# Altium PCB BasePCB.PcbDoc
Units mil, origin at the board's own origin, x right, y up, seen from the top; angles counter-clockwise.
Board outline 2700 x 2700 mil, 2 copper layers (Top Layer, Bottom Layer); 47 components, 69 nets, 235 pads, 32 vias.
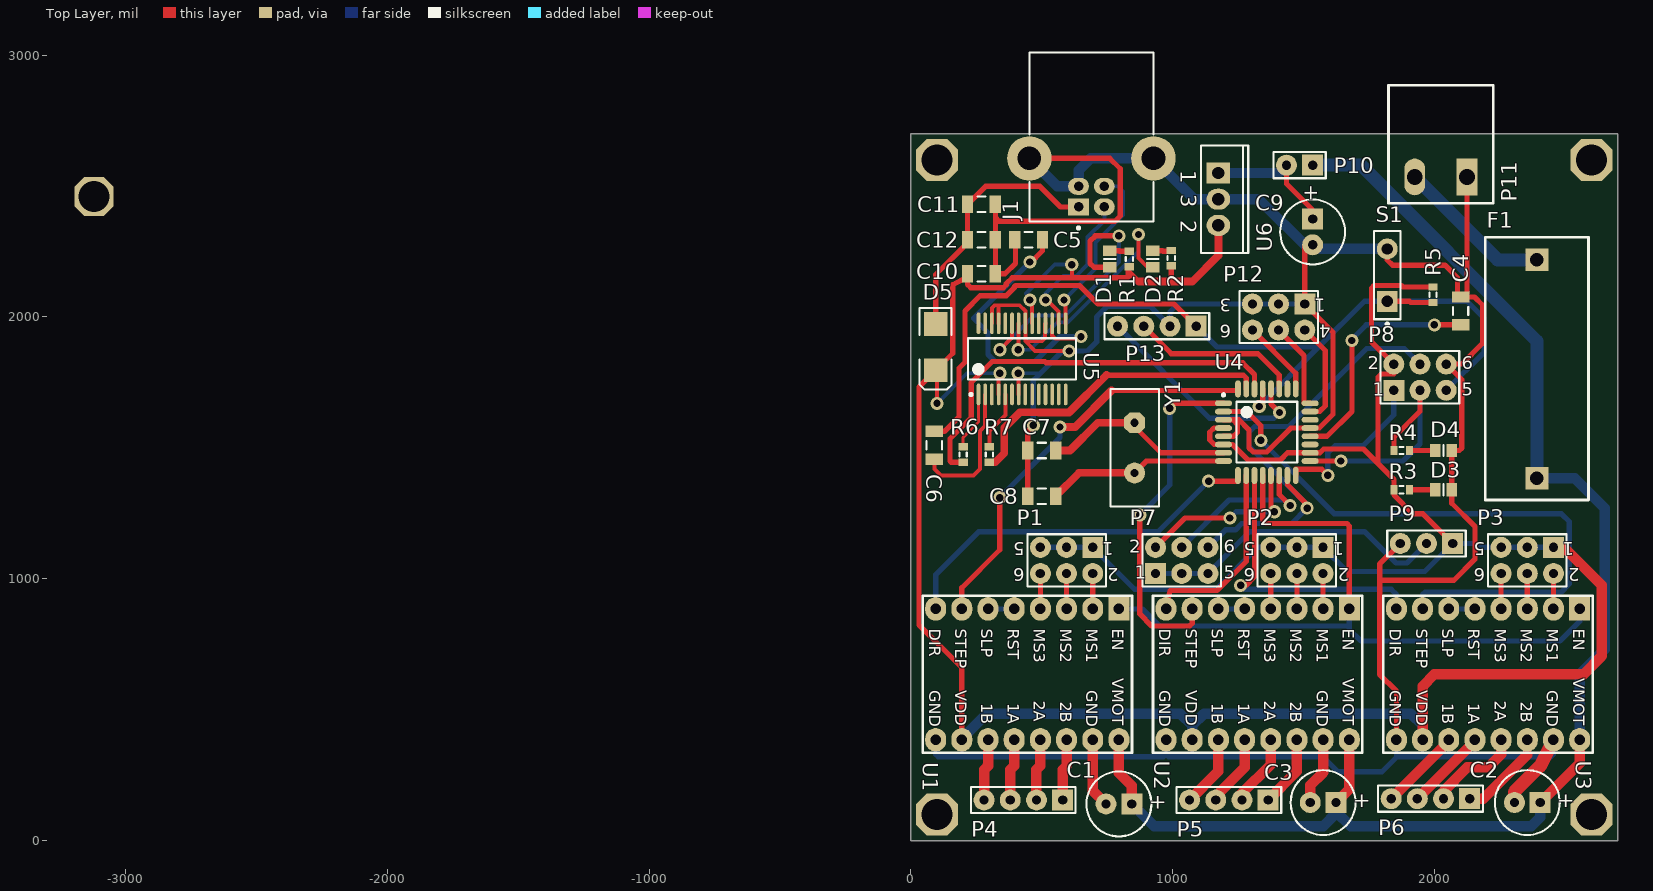
[diagram p0: Top Layer view]
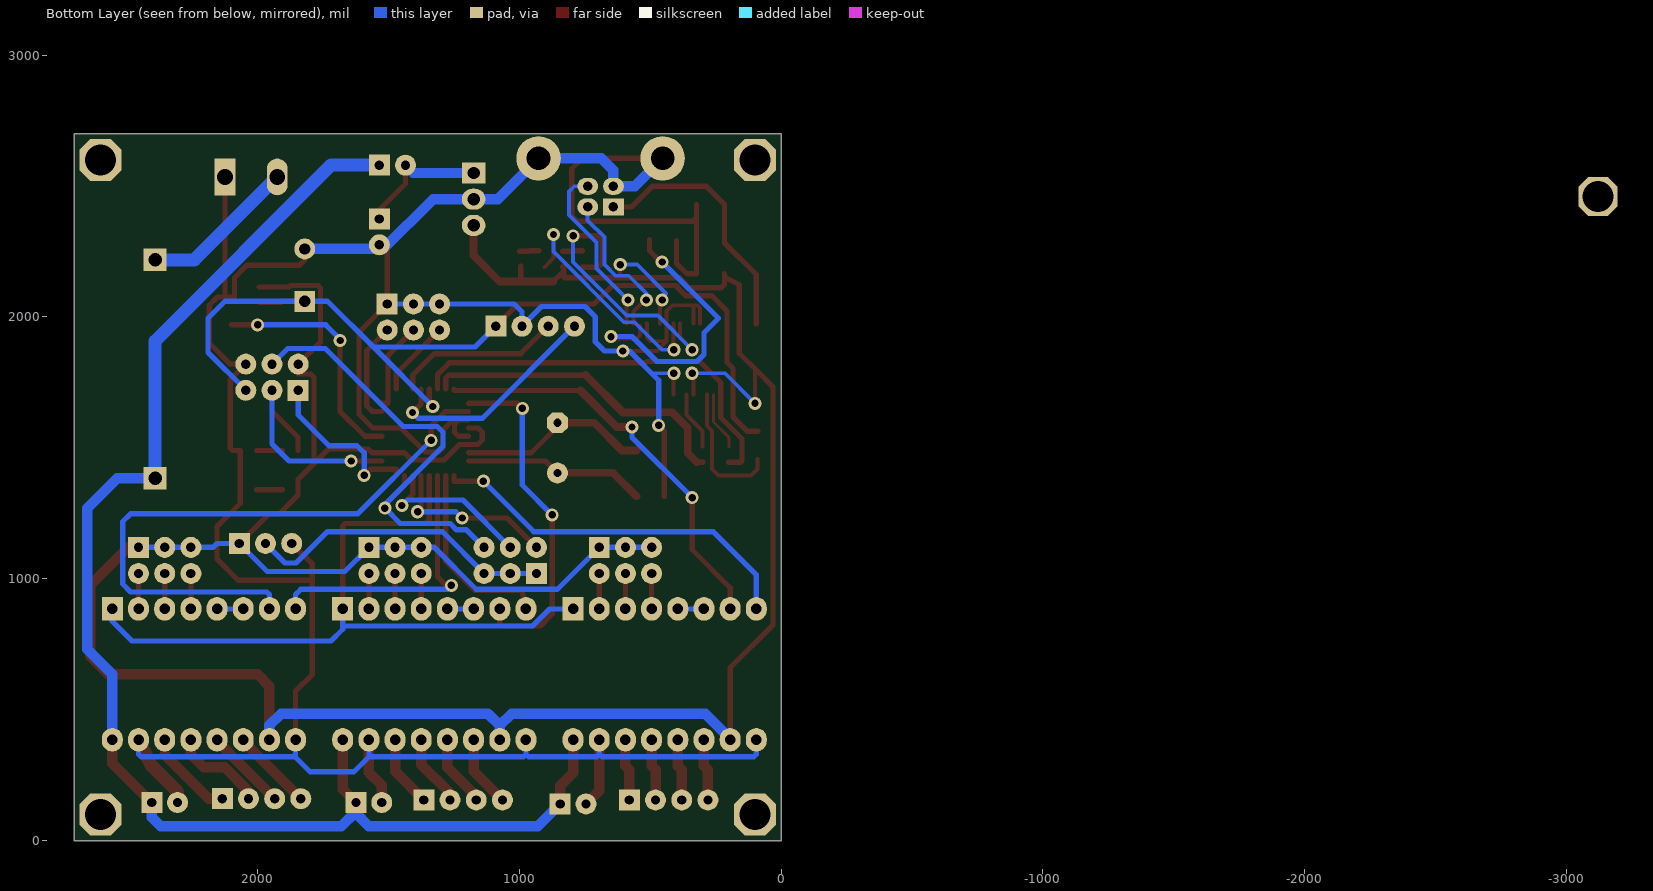
[diagram p1: Bottom Layer view, seen from below]

## Layer stack, top to bottom
Top Solder: solder mask 0.4, Solder Resist, Dk 3.5
Top Layer: signal copper 1.4
Dielectric 1: dielectric 12.6, FR-4, Dk 4.8
Bottom Layer: signal copper 1.4
Bottom Solder: solder mask 0.4, Solder Resist, Dk 3.5

## Board outline
0,0 2700,0 2700,2700 0,2700

## Design rules (kind name [scope] priority, off if disabled: settings)
Clearance [All] p1: gap=10
PolygonConnect [All] p1: connectstyle=Relief reliefconductorwidth=10 reliefentries=4 polygonreliefangle="90 Angle" airgapwidth=10
RoutingVias [All] p1: holewidth=28 width=50 viastyle="Through Hole" minholewidth=28 minwidth=50 maxholewidth=28 maxwidth=50
SolderMaskExpansion [All] p1: expansion=4
Width [All] p1: maxlimit=50 minlimit=10 preferedwidth=20
30 further rules are at their usual default settings.

## Components (designator, comment, footprint, x,y, rotation, side; value= is the part's Value field where it differs from the comment)
C1 "Cap Pol" CAPPR2.5-6.3x6.8/H.9 795,140 r180 top
C2 "Cap Pol" CAPPR2.5-6.3x6.8/H.9 2355,145 r180 top
C3 "Cap Pol" CAPPR2.5-6.3x6.8/H.9 1575,145 r180 top
C4 "Cap" C1206 2100,2023.15 r270 top
C5 "Cap" C1206 450,2295 r0 top
C6 "Cap" C1206 90,1510 r90 top
C7 "Cap" C1206 500,1490 r180 top
C8 "Cap" C1206 500,1315 r180 top
C9 "Cap Pol" CAPPR2.5-6.3x6.8/H.9 1535,2325 r270 top
C10 "Cap" C1206 270,2165 r180 top
C11 "Cap" C1206 270,2430 r180 top
C12 "Cap" C1206 270,2295 r180 top
D1 "LED" 6-0805_L 760,2221.5 r270 top
D2 "LED" 6-0805_L 925,2221.5 r270 top
D3 "LED" 6-0805_L 2035,1340 r0 top
D4 "LED" 6-0805_L 2035,1490 r0 top
D5 "Diode" DSO-C2/X2.3 95,1885 r270 top
F1 "Fuse" BLX-A 2195,2305 r270 top
J1 "USB Type B" USB2.5-2H4D 690,2460 r90 top
P1 "Header 3X2" HDR2X3 695,1120 r180 top
P2 "Header 3X2" HDR2X3 1575,1120 r180 top
P3 "Header 3X2" HDR2X3 2455,1120 r180 top
P4 "Header 4" HDR1X4 580,155 r180 top
P5 "Header 4" HDR1X4 1365,155 r180 top
P6 "Header 4" HDR1X4 2135,160 r180 top
P7 "Header 3X2" HDR2X3 935,1020 r0 top
P8 "ICSP" HDR2X3 1845,1720 r0 top
P9 "Header 3" HDR1X3 2070,1135 r180 top
P10 "Header 2" HDR1X2 1535,2580 r180 top
P11 "Header 2" "2Pin Phoenix Contact" 2225,2435 r90 top
P12 "Header 3X2A" HDR2X3_CEN 1505,2050 r180 top
P13 "Header 4" HDR1X4 1090,1965 r180 top
R1 "Res" J1-0603 835,2221.5 r90 top
R2 "Res" J1-0603 995,2225 r90 top
R3 "Res" J1-0603 1875,1340 r0 top
R4 "Res" J1-0603 1875,1490 r0 top
R5 "Res" J1-0603 1995,2085 r90 top
R6 "Res" J1-0603 200,1475 r90 top
R7 "Res" J1-0603 300,1475 r90 top
S1 "SW-PB" SPST-2 1820,2160 r90 top
U1 "A4988" DIP16 45,935 r270 top
U2 "A4988" DIP16 925,935 r270 top
U3 "A4988" DIP16 1805,935 r270 top
U4 "ATmega328P-AU" 32A_N 1360,1560 r0 top
U5 "FT232RL-Reel" SSOP-28_N 425,1840 r90 top
U6 "L78M05CP" ISOWATT220AB 1175,2450 r270 top
Y1 "XTAL" BCY-W2/E4.7 855,1500 r270 top

## Footprints (in the part's own frame and the unit in brackets; to place one, negate y for a bottom-side part, rotate by r counter-clockwise, add the part's x,y. Pads: shape width x height; smd on the part's side, far side on the other; paste and mask are expansions set on the pad)
"2Pin Phoenix Contact" [mil]
  rect 140x80 hole 60: 1(100,100)
  oval 140x80 hole 60: 2(100,300)
  silkscreen extent 0,0 450,400
6-0805_L [mm] "Chip Resistor, Body 2.0x1.2mm, IPC High Density"
  rect 1x1.3 smd: 1(-0.8,0) 2(0.8,0)
  silkscreen extent 0,-0.55 0,0.55, body extent -1.07,-0.7 1.07,0.7, height 0.7
32A_N [mm] "Thin QFP, 32-Leads, Body 7x7mm, Pitch 0.8mm, IPC Medium Density"
  oval 1.65x0.55 smd: 1(-4.2,2.8) 2(-4.2,2) 3(-4.2,1.2) 4(-4.2,0.4) 5(-4.2,-0.4) 6(-4.2,-1.2) 7(-4.2,-2) 8(-4.2,-2.8) 17(4.2,-2.8) 18(4.2,-2) 19(4.2,-1.2) 20(4.2,-0.4) 21(4.2,0.4) 22(4.2,1.2) 23(4.2,2) 24(4.2,2.8)
  oval 0.55x1.65 smd: 9(-2.8,-4.2) 10(-2,-4.2) 11(-1.2,-4.2) 12(-0.4,-4.2) 13(0.4,-4.2) 14(1.2,-4.2) 15(2,-4.2) 16(2.8,-4.2) 25(2.8,4.2) 26(2,4.2) 27(1.2,4.2) 28(0.4,4.2) 29(-0.4,4.2) 30(-1.2,4.2) 31(-2,4.2) 32(-2.8,4.2)
  silkscreen extent -4.32,-2.95 2.95,3.75, body extent -3.5,-3.5 3.5,3.5, height 1.2
BCY-W2/E4.7 [mil] "Quartz Crystal, Thru-Hole; 2 Leads; Body 11.35 x 4.65 x 13.46 mm (LxWxH max)"
  oct 80x80 hole 31.5: 1(-96.06,0)
  round 80 hole 31.5: 2(96.06,0)
  silkscreen extent -224,-93 224,93
BLX-A [mm]
  rect 2.2x2.2 hole 1.3: 1(2.2,5) 2(23.4,5)
  silkscreen extent 0,0 25.5,10
C1206 [mm] "Chip Capacitor, Body 3.2x1.6mm, IPC High Density"
  rect 1.1x1.7 smd: 1(-1.35,0) 2(1.35,0)
  silkscreen extent -0.4,-0.75 0.4,0.75, body extent -1.7,-0.9 1.7,0.9, height 1.3
CAPPR2.5-6.3x6.8/H.9 [mil] "Capacitor, Electrolytic, Radial; Body 6.3 x 6.8 mm (Dia.xH typ); Pin Spacing 2.5 mm (typ)"
  rect 80x80 hole 35.43: 1(-49.21,0)
  round 80 hole 35.43: 2(49.21,0)
  silkscreen extent -124,-124 124,124
DIP16 [mil]
  rect 90x80 hole 40: 1(50,750)
  oval 90x80 hole 40: 2(50,650) 3(50,550) 4(50,450) 5(50,350) 6(50,250) 7(50,150) 8(50,50) 9(550,50) 10(550,150) 11(550,250) 12(550,350) 13(550,450) 14(550,550) 15(550,650) 16(550,750)
  silkscreen extent 0,0 600,800
DSO-C2/X2.3 [mm] "DO-214-AA/SMB; 2 C-Bend Leads; Body 5.3 x 3.6 mm, inc. leads (LxW)"
  rect 2.3x2.3 smd: 1(-2.25,0) 2(2.25,0)
  silkscreen extent -3.8,-1.55 4.1,1.55
HDR1X2 [mil] "Connector; Header; 2 Position"
  rect 80x80 hole 35.43: 1(0,0)
  round 80 hole 35.43: 2(100,0)
  silkscreen extent -50,-50 150,50
HDR1X3 [mil] "Connector; Header; 3 Position"
  rect 80x80 hole 35.43: 1(0,0)
  round 80 hole 35.43: 2(100,0) 3(200,0)
  silkscreen extent -50,-50 250,50
HDR1X4 [mil] "Connector; Header; 4 Position"
  rect 80x80 hole 35.43: 1(0,0)
  round 80 hole 35.43: 2(100,0) 3(200,0) 4(300,0)
  silkscreen extent -50,-50 350,50
HDR2X3 [mil] "Connector; Header; 3x2 Position"
  rect 80x80 hole 35.43: 1(0,0)
  round 80 hole 35.43: 2(0,100) 3(100,0) 4(100,100) 5(200,0) 6(200,100)
  silkscreen extent -50,-50 250,150
HDR2X3_CEN [mil] "Connector; Header; 3x2 Position"
  rect 80x80 hole 35.43: 1(0,0)
  round 80 hole 35.43: 2(100,0) 3(200,0) 4(0,100) 5(100,100) 6(200,100)
  silkscreen extent -50,-50 250,150
ISOWATT220AB [mil] "TO, Thru-Hole, Vertical, Heatsink Mounted; 3 In-Line Leads; Pitch 2.54 mm; Pin sequence 1, 3, 2"
  rect 80x90 hole 47.24: 1(-100,0)
  oval 80x90 hole 47.24: 2(100,0) 3(0,0)
  silkscreen extent -205,-67 205,114
J1-0603 [mm] "Chip Resistor, Body 1.6x0.8mm, IPC High Density"
  rect 0.7x0.9 smd: 1(-0.75,0) 2(0.75,0)
  silkscreen extent -0.2,-0.35 0.2,0.35, body extent -0.85,-0.48 0.85,0.48, height 0.9
SPST-2 [mil] "Switch; 2 Leads"
  rect 80x80 hole 43.31: 1(-100,0)
  round 80 hole 43.31: 2(100,0)
  silkscreen extent -192,-50 169,50
SSOP-28_N [mm] "SOP, 28-Leads, Body 10.2x5.3mm, Pitch 0.65mm, IPC Medium Density"
  oval 2.1x0.35 smd: 1(-3.45,4.225) 2(-3.45,3.575) 3(-3.45,2.925) 4(-3.45,2.275) 5(-3.45,1.625) 6(-3.45,0.975) 7(-3.45,0.325) 8(-3.45,-0.325) 9(-3.45,-0.975) 10(-3.45,-1.625) 11(-3.45,-2.275) 12(-3.45,-2.925) 13(-3.45,-3.575) 14(-3.45,-4.225) 15(3.45,-4.225) 16(3.45,-3.575) 17(3.45,-2.925) 18(3.45,-2.275) 19(3.45,-1.625) 20(3.45,-0.975) 21(3.45,-0.325) 22(3.45,0.325) 23(3.45,0.975) 24(3.45,1.625) 25(3.45,2.275) 26(3.45,2.925) 27(3.45,3.575) 28(3.45,4.225)
  silkscreen extent -3.57,-5.25 2,5.25, body extent -2.8,-5.25 2.8,5.25, height 2
USB2.5-2H4D [mm] "Connector; USB1.1, Type B, Thru-Hole; 4 Position; Right Angle"
  rect 1.651x2.032 hole 0.92: 1(-1,1.25)
  oval 1.651x2.032 hole 0.92: 2(-1,-1.25) 3(1,-1.25) 4(1,1.25)
  round 4.318 hole 2.3: 5(3.71,6.02) 6(3.71,-6.02)
  silkscreen extent -3.18,-6.02 13.99,6.02, body extent -2.41,-6.02 13.99,6.02, height 11.1

## Part data
C1 C2 C3 C9: library part "Cap Pol1", "Polarized Capacitor (Radial)"
C4 C5 C6 C7 C8 C10 C11 C12: library part "Cap Semi", "Capacitor (Semiconductor SIM Model)"
D1 D2 D3 D4: library part LED3, "Typical BLUE SiC LED"
D5: "Default Diode"
F1: library part "Fuse 2"
J1: library part "Header 6", "Header, 6-Pin"
P1 P2 P3 P7 P12: "Header, 3-Pin, Dual row"
P4 P5 P6 P13: "Header, 4-Pin"
P8: library part "Header 3X2", "Header, 3-Pin, Dual row"
P9: "Header, 3-Pin"
P10 P11: "Header, 2-Pin"
R1 R2 R3 R4 R5 R6 R7: library part Res3, "Resistor"
S1: "Switch"
U1 U2 U3: "Stepper Motor Driver"
U4: "8-bit AVR Microcontroller, 32KB Flash, 1KB EEPROM, 2KB SRAM, 32-pin TQFP, Industrial Grade (-40°C to 85°C)"
U5: "USB UART Asynchronous Serial Data Transfer Chip, 28-pin SSOP, Tape and Reel"
U6: "Positive Voltage Regulator"
Y1: "Crystal Oscillator"

## Free pads (board coordinates)
  oct 150x150 hole 118: 0(-3120,2460)
  oct 160x160 hole 118: 0(100,100) 0(100,2600) 0(2600,100) 0(2600,2600)

## Via types
v1: diameter 50, hole 28, Top Layer to Bottom Layer, 32 vias

## Nets (pads, with @x,y where several pads share a name; then routed paths per layer and width w, separated by ;. In a path a pad name is that pad's centre, name@x,y a point inside that pad or via, vN(x,y) a via of type N, cw(c..) or ccw(c..) an arc to the next point about the centre after c; other vN are vias at no path point)
3V3: C5.2 U5.17 | length 1140.6
  Top Layer w15: U5.17@539.56,1965.46 539.56,1929.42 551.99,1916.99 641.99,1916.99 v1(650,1925)
  Top Layer w20: v1(455,2210) 455,2205 503.15,2253.15 C5.2
  Bottom Layer w20: v1(455,2210) 240,1995 295,1940 295,1856.36 321.36,1830 475,1830 570,1925 v1(650,1925)
A0: P12.4 U4.23 | length 388.8
  Top Layer w20: P12.4 1583,1872 1583,1660 1561.74,1638.74 U4.23
A1: P12.5 U4.24 | length 343.3
  Top Layer w20: P12.5 1502,1853 1502,1670.24 U4.24
A2: P12.6 U4.25 | length 293.1
  Top Layer w20: P12.6 1470.24,1784.76 U4.25
A3/COOLANT: U4.26
A4: P13.3 U4.27 | length 647.3
  Top Layer w20: P13.3 995,1860 1325.24,1860 1407.24,1778 U4.27
A5: P13.4 U4.28 | length 877.3
  Top Layer w20: U4.28 1375.75,1667.67 v1(1408.42,1635)
  Bottom Layer w20: P13.4 1142.13,1612.87 1386.29,1612.87 v1(1408.42,1635)
A6: U4.19
A7: U4.22
AREF: C4.2 U4.20 | length 912.5
  Top Layer w20: U4.20 1590,1544.25 1685,1639.25 v1(1685,1910) ; v1(2000,1970) C4.2
  Bottom Layer w20: v1(1685,1910) 1685,1915 1740,1970 v1(2000,1970)
D0/RX: R6.1 U4.30 | length 1575.7
  Top Layer w20: R6.1 154.53,1445.47 150,1450 150,1535 231,1616 231,1750 311,1830 511.36,1830 516.36,1825 1267.76,1825 1312.76,1780 U4.30
D1/TX: R7.1 U4.31 | length 1221.9
  Top Layer w20: R7.1 322.47,1445.47 ; 747.11,1777.84 1270,1777.84 1281.26,1766.58 U4.31
  Top Layer w30: 322.47,1445.47 357,1480 357,1576 417,1636 488.71,1636 489.71,1635 604.27,1635 747.11,1777.84
D2/XSTEP: U1.7 U4.32 | length 1594
  Top Layer w20: U1.7 195,966 340,1111 v1(340,1310) ; 767,1719 1249.76,1719 U4.32
  Top Layer w30: v1(570,1580) 628,1580 767,1719
  Bottom Layer w20: v1(340,1310) 570,1540 v1(570,1580)
D3/YSTEP: U2.7 U4.1 | length 1324.6
  Top Layer w20: v1(875,1244) 875,865 920,820 1065,820 1075,830 U2.7 ; v1(989,1651) 1008.24,1670.24 U4.1
  Bottom Layer w20: v1(875,1244) 989,1358 v1(989,1651)
D4/ZSTEP: U3.7 U4.2 | length 2397.8
  Top Layer w20: U4.2 1283.58,1638.74 1337,1585.32 v1(1337,1529)
  Bottom Layer w20: v1(1337,1529) 1618,1248 2486,1248 2515,1219 2515,980 2485,950 1965,950 1955,940 U3.7
D5/XDIR: U1.8 U4.9 | length 1454.7
  Top Layer w20: v1(1138,1373) 1249.76,1373 U4.9
  Bottom Layer w20: U1.8 95,1015 260,1180 945,1180 v1(1138,1373)
D6/YDIR: U2.8 U4.10 | length 737.3
  Top Layer w20: U2.8 990,955 1170,955 1281.26,1066.26 U4.10
D7/ZDIR: U3.8 U4.11 | length 1117.7
  Top Layer w20: v1(1260,975) 1280,975 1312.76,1007.76 U4.11
  Bottom Layer w20: v1(1260,975) 1275,960 1835,960 1855,940 U3.8
D8/EN: U1.1 U2.1 U3.1 U4.12 | length 2788.8
  Top Layer w20: U4.12 1344.25,1342.25 1344,1342 1344,1226.95 1360,1210.95 1666.05,1210.95 1675,1202 U2.1
  Bottom Layer w20: U1.1 885,885 950,820 1675,820 ; U2.1 1675,820 ; U3.1 2555,837 2480,762 1720,762 1675,807 1675,820
D9/XENDSTOP: P7.2 U4.13 | length 654.5
  Top Layer w20: P7.2 1047,1232 v1(1219,1232) ; U4.13 1375.75,1269.25 v1(1389,1256)
  Bottom Layer w20: v1(1219,1232) 1243,1256 v1(1389,1256)
D10/YENDSTOP: P7.4 U4.14 | length 629.6
  Top Layer w20: U4.14 1407.24,1321.76 v1(1449,1280)
  Bottom Layer w20: P7.4 1216,1301 1428,1301 v1(1449,1280)
D11/MOSI/ZENDSTOP: P7.6 P8.4 U4.15 | length 1775.1
  Top Layer w20: U4.15 1438.74,1359.43 1514,1284.17 v1(1514,1270)
  Bottom Layer w20: P7.6 1202,1187 1240.05,1187 1264,1210.95 1454.95,1210.95 v1(1514,1270) ; v1@1514,1284.17 1292,1506.17 1292,1560 1314,1582 1444,1582 1742,1880 1885,1880 P8.4
D12/MISO/SPINENABLE: P8.1 U4.16 | length 647.7
  Top Layer w20: U4.16 1470.24,1418 1570,1418 v1(1593,1395)
  Bottom Layer w20: v1(1593,1395) 1593,1481 1620,1508 1727,1508 1845,1626 P8.1
D13/SCK/SPINDIR: P8.3 R4.1 U4.17 | length 923
  Top Layer w20: U4.17 v1(1642.76,1449.76) ; R4.1 1845.47,1540.47 1945,1640 P8.3
  Bottom Layer w20: v1(1642.76,1449.76) 1880,1449.76 1945,1514.76 P8.3
DM: J1.2 U5.16 | length 591.6
  Top Layer w15: v1(515,2065) 515.75,2064.25 520.67,2064.25 564.55,2020.38 564.55,1975.83 U5.16
  Bottom Layer w15: v1(515,2065) 515,2090 582.5,2157.5 632.6,2157.5 675,2199.9 675,2305 739.21,2369.21 J1.2
DP: J1.3 U5.15 | length 678.8
  Top Layer w15: v1(585,2065) 585,2047.68 591.34,2041.34 U5.15
  Bottom Layer w15: v1(585,2065) 705,2185 705,2285 810,2390 810,2480 790.63,2499.37 J1.3
ES_SELECT: P7.1 P7.3 P7.5 P9.2 | length 1182
  Bottom Layer w20: P7.1 P7.3 P7.5 1295,1180 1733,1180 1853,1060 1895,1060 P9.2
EXTV: C1.1 C2.1 C3.1 F1.2 P10.1 U1.16 U2.16 U3.16 | length 5501.7
  Top Layer w40: U1.16 795,259.21 844.21,210 C1.1 ; C3.1 1675,195.79 U2.16 ; C2.1 2555,295.79 U3.16
  Bottom Layer w40: C1.1 929.21,55 1575,55 1624.21,104.21 C3.1 1624.21,110.79 1680,55 2370,55 2404.21,89.21 C2.1 ; F1.2 2536.26,1383.74 2650,1270 2650,730 2555,635 U3.16
  Bottom Layer w50: P10.1 1720,2580 2391.85,1908.15 F1.2
GND: C1.2 C2.2 C3.2 C4.1 C5.1 C7.2 C8.2 C9.2 C10.1 C11.1 C12.1 D3.2 D4.2 J1.4 J1.5 J1.6 P8.6 P9.3 P11.1 P12.1 P12.2 P12.3 P13.2 S1.2 U1.9 U1.15 U2.9 U2.15 U3.9 U3.15 U4.3 U4.5 U4.21 U5.7 U5.18 U5.21 U5.25 U5.26 U6.3 | length 14097.5
  Top Layer w15: U5.26 309.84,2034.84 317.45,2042.45 ; 319.95,2044.95 414.95,2044.95 437.8,2022.1 U5.21 437.8,1917.2 ; U5.25@335,1975.39 U5.25 335.43,2044.51 ; v1(410,1785) 412.2,1782.8 U5.7 ; 437.8,1915 437.8,1907.31 ; U5.18 513.37,1974.63 513.37,1919.83 500.85,1907.31 437.8,1907.31 ; v1(605,1870) 475.1,1870 437.8,1907.31
  Top Layer w20: C11.1 323.15,2380 ; C5.1@400,2291.85 400,2205 360,2165 C10.1 C12.1 323.15,2380 ; C8.2 C7.2 446.85,1564.85 v1(468,1586) ; J1.5 760,2606.06 800,2566.06 800,2386 780,2366 337.15,2366 323.15,2380 ; U4.5 1232.25,1544.25 1248,1560 1248,1590 1230.76,1607.24 ; U4.3 1230.76,1607.24 ; C9.2 1510,2275.79 1505,2270.79 P12.1 1613,1942 1613,1628.75 1560,1575.75 U4.21 1451.75,1575.75 1360,1484 1308,1484 1292,1500 1292,1568.83 1253.58,1607.24 1230.76,1607.24 ; S1.2 1820,2218 1840,2198 2040,2198 2088,2150 2088,2076.3 C4.1 C4.1@2125,2076.3 ; U3.9 1855,571 1791,635 1791,994 ; P9.3 1791,1056 1791,994 ; P11.1 C4.1@2125,2076.3 ; 1791,994 2074,994 2155,1075 2155,1200 2066.5,1288.5 D3.2 D4.2 2095,1490 2105,1500 2105,1760 P8.6 2105,1820 2185,1900 2185,2045 2153.7,2076.3 C4.1@2125,2076.3
  Top Layer w40: U1.15 695,190.79 C1.2 ; C3.2 1525.79,210.79 1575,260 U2.15
  Top Layer w50: C2.2 2305.79,185.79 2403.15,283.15 U3.15
  Bottom Layer w15: v1(410,1785) 495,1785
  Bottom Layer w20: U1.9 95,330 105,320 685,320 695,330 ; v1(468,1586) 468,1758 580,1870 v1(605,1870) 675,1870 710,1905 710,2000 750,2040 915,2040 P13.2 990,2020 1020,2050 P12.3 P12.2 P12.1 ; U1.15 695,330 ; U2.9 975,330 ; U2.15 1575,330 ; U3.9 1855,330 ; U3.15 2455,330 2445,320 1865,320 1855,330 ; 695,330 705,320 965,320 975,330 ; 975,330 985,320 1565,320 1575,330 ; 1575,330 1575,320 1632,263 1800,263 1855,318 1855,330
  Bottom Layer w40: J1.5 559.69,2499.37 J1.4 640.79,2560 686.85,2606.06 J1.6 1083.07,2450 U6.3 1330,2450 1520,2260 S1.2
NetC6_1: C6.1 U5.2 | length 524.7
  Top Layer w15: C6.1 90,1420 115,1395 240,1395 264.78,1419.78 264.78,1565.14 284.25,1584.61 U5.2
NetC7_1: C7.1 U4.7 Y1.1 | length 733
  Top Layer w20: Y1.1@840,1596.06 954.8,1481.26 U4.7
  Top Layer w30: C7.1 608,1490 714.06,1596.06 Y1.1@840,1596.06
NetC8_1: C8.1 U4.8 Y1.2 | length 697.3
  Top Layer w20: Y1.2@855,1405 899.76,1449.76 U4.8
  Top Layer w30: C8.1 643.15,1405 Y1.2@855,1405
NetD1_1: D1.1 R1.2 | length 75.8
  Top Layer w20: D1.1 796,2252.99 797.97,2251.02 R1.2
NetD2_1: D2.1 R2.2 | length 75.8
  Top Layer w20: D2.1 961,2252.99 962.97,2251.02 R2.2@1000,2251.02
NetD3_1: D3.1 R3.2 | length 99
  Top Layer w20: R3.2 D3.1
NetD4_1: D4.1 R4.2 | length 99
  Top Layer w20: R4.2 D4.1
NetF1_1: F1.1 P11.2 | length 598
  Bottom Layer w50: P11.2 2241.61,2218.39 F1.1
NetP1_2: P1.2 U1.2 | length 135
  Top Layer w20: U1.2 P1.2
NetP1_4: P1.4 U1.3 | length 135
  Top Layer w20: U1.3 P1.4
NetP1_6: P1.6 U1.4 | length 135
  Top Layer w20: U1.4 P1.6
NetP2_2: P2.2 U2.2 | length 135
  Top Layer w20: U2.2 P2.2
NetP2_4: P2.4 U2.3 | length 135
  Top Layer w20: U2.3 P2.4
NetP2_6: P2.6 U2.4 | length 139.9
  Top Layer w20: U2.4 1380,890 1375,921.25 1375,983.75 1380,1015 P2.6
NetP3_2: P3.2 U3.2 | length 135
  Top Layer w20: U3.2 P3.2
NetP3_4: P3.4 U3.3 | length 135
  Top Layer w20: U3.3 P3.4
NetP3_6: P3.6 U3.4 | length 135
  Top Layer w20: U3.4 P3.6
NetP4_1: P4.1 U1.14 | length 236.2
  Top Layer w40: P4.1 580,270 595,285 U1.14
NetP4_2: P4.2 U1.13 | length 236.2
  Top Layer w40: P4.2 480,270 495,285 U1.13
NetP4_3: P4.3 U1.12 | length 236.2
  Top Layer w40: P4.3 380,270 395,285 U1.12
NetP4_4: P4.4 U1.11 | length 236.2
  Top Layer w40: P4.4 280,270 295,285 U1.11
NetP5_1: P5.1 U2.14 | length 275.6
  Top Layer w40: P5.1 1475,265 U2.14
NetP5_2: P5.2 U2.13 | length 275.6
  Top Layer w40: P5.2 1265,180 1375,290 U2.13
NetP5_3: P5.3 U2.12 | length 275.6
  Top Layer w40: P5.3 1165,170 1275,280 U2.12
NetP5_4: P5.4 U2.11 | length 275.6
  Top Layer w40: P5.4 1175,265 U2.11
NetP6_1: P6.1 U3.14 | length 346.6
  Top Layer w20: 2355,328 U3.14
  Top Layer w40: P6.1 2187,160 2355,328
NetP6_2: P6.2 U3.13 | length 362.6
  Top Layer w40: P6.2 2035,189.29 2125.71,280 2205,280 2255,330 U3.13
NetP6_3: P6.3 U3.12 | length 316.1
  Top Layer w20: U3.12@2155,380 U3.12
  Top Layer w40: P6.3 U3.12@2155,380
NetP6_4: P6.4 U3.11 | length 316.1
  Top Layer w20: U3.11@2055,380 U3.11
  Top Layer w40: P6.4 U3.11@2055,380
NetR6_2: R6.2 U5.1 | length 223.9
  Top Layer w12: R6.2 200,1540 258.66,1598.66 U5.1
NetR7_2: R7.2 U5.5 | length 224.9
  Top Layer w15: R7.2 300,1565 361.02,1626.02 U5.5
NetU1_5: U1.5 U1.6 | length 100
  Bottom Layer w20: U1.6 U1.5
NetU2_5: U2.5 U2.6 | length 100
  Bottom Layer w20: U2.6 U2.5
NetU3_5: U3.5 U3.6 | length 100
  Bottom Layer w20: U3.6 U3.5
RESET: C6.2 P8.5 P13.1 R5.1 S1.1 U4.29 | length 3659.4
  Top Layer w20: C6.2 129.15,1563.15 184,1618 184,1804 207,1827 207,2023 265.54,2081.54 365.51,2081.54 394.8,2110.82 394.8,2114.95 399.85,2120 645,2120 715,2050 1005,2050 P13.1 ; v1(1331,1658) 1344.25,1671.25 U4.29 ; S1.1 1905,2060 1909.53,2055.47 R5.1
  Bottom Layer w20: P13.1 1170,1885 1558,1885 ; v1(1331,1658) 1558,1885 ; P8.5 2190,1865 2190,1995 2125,2060 S1.1 1733,2060 1558,1885
RX_LED: D1.2 U5.23 | length 1098.4
  Top Layer w15: v1(340,1875) 386.61,1921.61 U5.23
  Top Layer w20: D1.2 700,2190 685,2205 685,2290 705,2310 v1(795,2310)
  Bottom Layer w15: v1(340,1875) 470,2005 590,2005 795,2210 v1(795,2310)
TX_LED: D2.2 U5.22 | length 930.1
  Top Layer w15: v1(410,1875) 400,1885 412.2,1897.2 U5.22 ; v1(870,2315) 870.22,2314.78 870.22,2224.78 D2.2@905,2190
  Bottom Layer w15: v1(410,1875) 455,1875 560,1980 600.36,1980 870,2249.64 v1(870,2315)
VCC: C10.2 D5.2 P1.1 P1.3 P1.5 P2.1 P2.3 P2.5 P3.1 P3.3 P3.5 P8.2 P9.1 R1.1 R2.1 R3.1 R5.2 U1.10 U2.10 U3.10 U4.4 U4.6 U4.18 U5.4 U5.20 U6.2 | length 11974.1
  Top Layer w15: D5.2 100,1791.42 v1(100,1670) ; U5.4 335.43,1784.57 335.87,1785 v1(340,1785) ; v1(455,2065) 455,2063.23 465,2053.23 463.39,2051.61 U5.20 ; 615,2150 v1(615,2200)
  Top Layer w20: U1.10 195,660 31,824 31,1732.42 D5.2 160.28,1861.69 160.28,2123.28 C10.2@216.85,2153 ; C10.2 C10.2@216.85,2153 ; R1.1 831,2191.97 831,2175 ; 871,2135 831,2175 ; 995,2135 R2.1@995,2195 ; U4.4 1157.75,1575.75 1142,1560 1142,1530 1159.24,1512.76 U4.6 1229.24,1512.76 1288,1454 1412,1454 1439.26,1481.26 U4.18 1563,1481.26 1577.74,1496 1729,1496 1785,1440 ; R5.2 1880,2114.53 1874.53,2120 1770,2120 1760,2110 1760,1905 P8.2 1845,1782 1797,1782 1785,1770 1785,1440 ; P9.1 1957,1248 1917.47,1248 1845.47,1320 R3.1 1845.47,1379.53 1785,1440 ; C10.2@216.85,2153 216.85,2124.15 229.46,2111.54 353.09,2111.54 364.8,2123.25 364.8,2127.38 387.43,2150 615,2150 828,2150 831,2153 831,2175
  Top Layer w30: 871,2135 1075,2135 1175,2235 U6.2
  Top Layer w40: U3.10 1955,590 2000,635 2570,635 2640,705 2640,975 2495,1120 P3.1
  Bottom Layer w15: v1(100,1670) 215,1785 v1(340,1785) ; v1(455,2065) 455,2075 440,2090 550,2200 v1(615,2200)
  Bottom Layer w20: U1.10 U1.10@195,388.99 ; P1.5 P1.3 P1.1 855,960 1165,960 1325,1120 P2.5 P2.3 P2.1 1667,1028 1963,1028 P9.1 2155,1135 2170,1120 P3.5 P3.3 P3.1
  Bottom Layer w40: U1.10@195,388.99 291.01,485 1030,485 1075,440 ; U2.10 1075,440 ; U3.10 1955,440 1910,485 1120,485 1075,440
VIN: C9.1 P10.2 U6.1 | length 491.7
  Top Layer w20: P10.2 1435,2509.21 C9.1@1540,2404.21
  Bottom Layer w20: 1405,2550 P10.2
  Bottom Layer w40: U6.1 1405,2550
VUSB: C11.2 C12.2 D5.1 J1.1 | length 991.9
  Top Layer w20: D5.1 95,2161.15 216.85,2283 C12.2 C11.2 285.85,2499 494,2499 572.37,2420.63 J1.1
pads on no net: U5.3 U5.6 U5.8 U5.9 U5.10 U5.11 U5.12 U5.13 U5.14 U5.19 U5.24 U5.27 U5.28

## Text inside footprints (layer, text, board x,y; h text height)
C1: Top Overlay "+" at 977.09,169.53 h59.05 r180
C2: Top Overlay "+" at 2537.09,174.53 h59.05 r180
C3: Top Overlay "+" at 1757.09,174.53 h59.05 r180
C9: Top Overlay "+" at 1505.47,2507.09 h59.05 r270
P1: Top Overlay "6" at 435,1040 h50 r180; Top Overlay "5" at 435,1140 h50 r180; Top Overlay "2" at 795,1040 h50 r180; Top Overlay "1" at 775,1140 h50 r180
P2: Top Overlay "6" at 1315,1040 h50 r180; Top Overlay "5" at 1315,1140 h50 r180; Top Overlay "2" at 1675,1040 h50 r180; Top Overlay "1" at 1655,1140 h50 r180
P3: Top Overlay "6" at 2195,1040 h50 r180; Top Overlay "5" at 2195,1140 h50 r180; Top Overlay "2" at 2555,1040 h50 r180; Top Overlay "1" at 2535,1140 h50 r180
P7: Top Overlay "6" at 1195,1100 h50; Top Overlay "5" at 1195,1000 h50; Top Overlay "2" at 835,1100 h50; Top Overlay "1" at 855,1000 h50
P8: Top Overlay "6" at 2105,1800 h50; Top Overlay "5" at 2105,1700 h50; Top Overlay "2" at 1745,1800 h50; Top Overlay "1" at 1765,1700 h50
P12: Top Overlay "4" at 1605,1970 h50 r180; Top Overlay "1" at 1585,2070 h50 r180; Top Overlay "3" at 1225,2070 h50 r180; Top Overlay "6" at 1225,1970 h50 r180
U1: Top Overlay "VMOT" at 770,620 h45 r270; Top Overlay "GND" at 670,575 h45 r270; Top Overlay "2B" at 570,530 h45 r270; Top Overlay "2A" at 470,535 h45 r270; Top Overlay "1A" at 370,525 h45 r270; Top Overlay "1B" at 270,525 h45 r270; Top Overlay "VDD" at 170,575 h45 r270; Top Overlay "GND" at 70,575 h45 r270; Top Overlay "DIR" at 70,810 h45 r270; Top Overlay "STEP" at 170,810 h45 r270; Top Overlay "SLP" at 270,810 h45 r270; Top Overlay "RST" at 370,810 h45 r270; Top Overlay "MS3" at 470,810 h45 r270; Top Overlay "MS2" at 570,810 h45 r270; Top Overlay "MS1" at 670,810 h45 r270; Top Overlay "EN" at 770,810 h45 r270
U2: Top Overlay "VMOT" at 1650,620 h45 r270; Top Overlay "GND" at 1550,575 h45 r270; Top Overlay "2B" at 1450,530 h45 r270; Top Overlay "2A" at 1350,535 h45 r270; Top Overlay "1A" at 1250,525 h45 r270; Top Overlay "1B" at 1150,525 h45 r270; Top Overlay "VDD" at 1050,575 h45 r270; Top Overlay "GND" at 950,575 h45 r270; Top Overlay "DIR" at 950,810 h45 r270; Top Overlay "STEP" at 1050,810 h45 r270; Top Overlay "SLP" at 1150,810 h45 r270; Top Overlay "RST" at 1250,810 h45 r270; Top Overlay "MS3" at 1350,810 h45 r270; Top Overlay "MS2" at 1450,810 h45 r270; Top Overlay "MS1" at 1550,810 h45 r270; Top Overlay "EN" at 1650,810 h45 r270
U3: Top Overlay "VMOT" at 2530,620 h45 r270; Top Overlay "GND" at 2430,575 h45 r270; Top Overlay "2B" at 2330,530 h45 r270; Top Overlay "2A" at 2230,535 h45 r270; Top Overlay "1A" at 2130,525 h45 r270; Top Overlay "1B" at 2030,525 h45 r270; Top Overlay "VDD" at 1930,575 h45 r270; Top Overlay "GND" at 1830,575 h45 r270; Top Overlay "DIR" at 1830,810 h45 r270; Top Overlay "STEP" at 1930,810 h45 r270; Top Overlay "SLP" at 2030,810 h45 r270; Top Overlay "RST" at 2130,810 h45 r270; Top Overlay "MS3" at 2230,810 h45 r270; Top Overlay "MS2" at 2330,810 h45 r270; Top Overlay "MS1" at 2430,810 h45 r270; Top Overlay "EN" at 2530,810 h45 r270
U6: Top Overlay "1" at 1030.32,2559.84 h59.06 r270; Top Overlay "2" at 1030.32,2369.68 h59.06 r270; Top Overlay "3" at 1030.32,2469.68 h59.06 r270